# Altium PCB Banker_EDGE_2_BNC.PCBDOC
Units mm, origin at the board's own origin, x right, y up, seen from the top; angles counter-clockwise.
Board outline 45 x 72.8 mm, 2 copper layers (Top, Bot), stack 1.571 mm thick; 22 components, 25 nets, 96 pads, 64 vias.
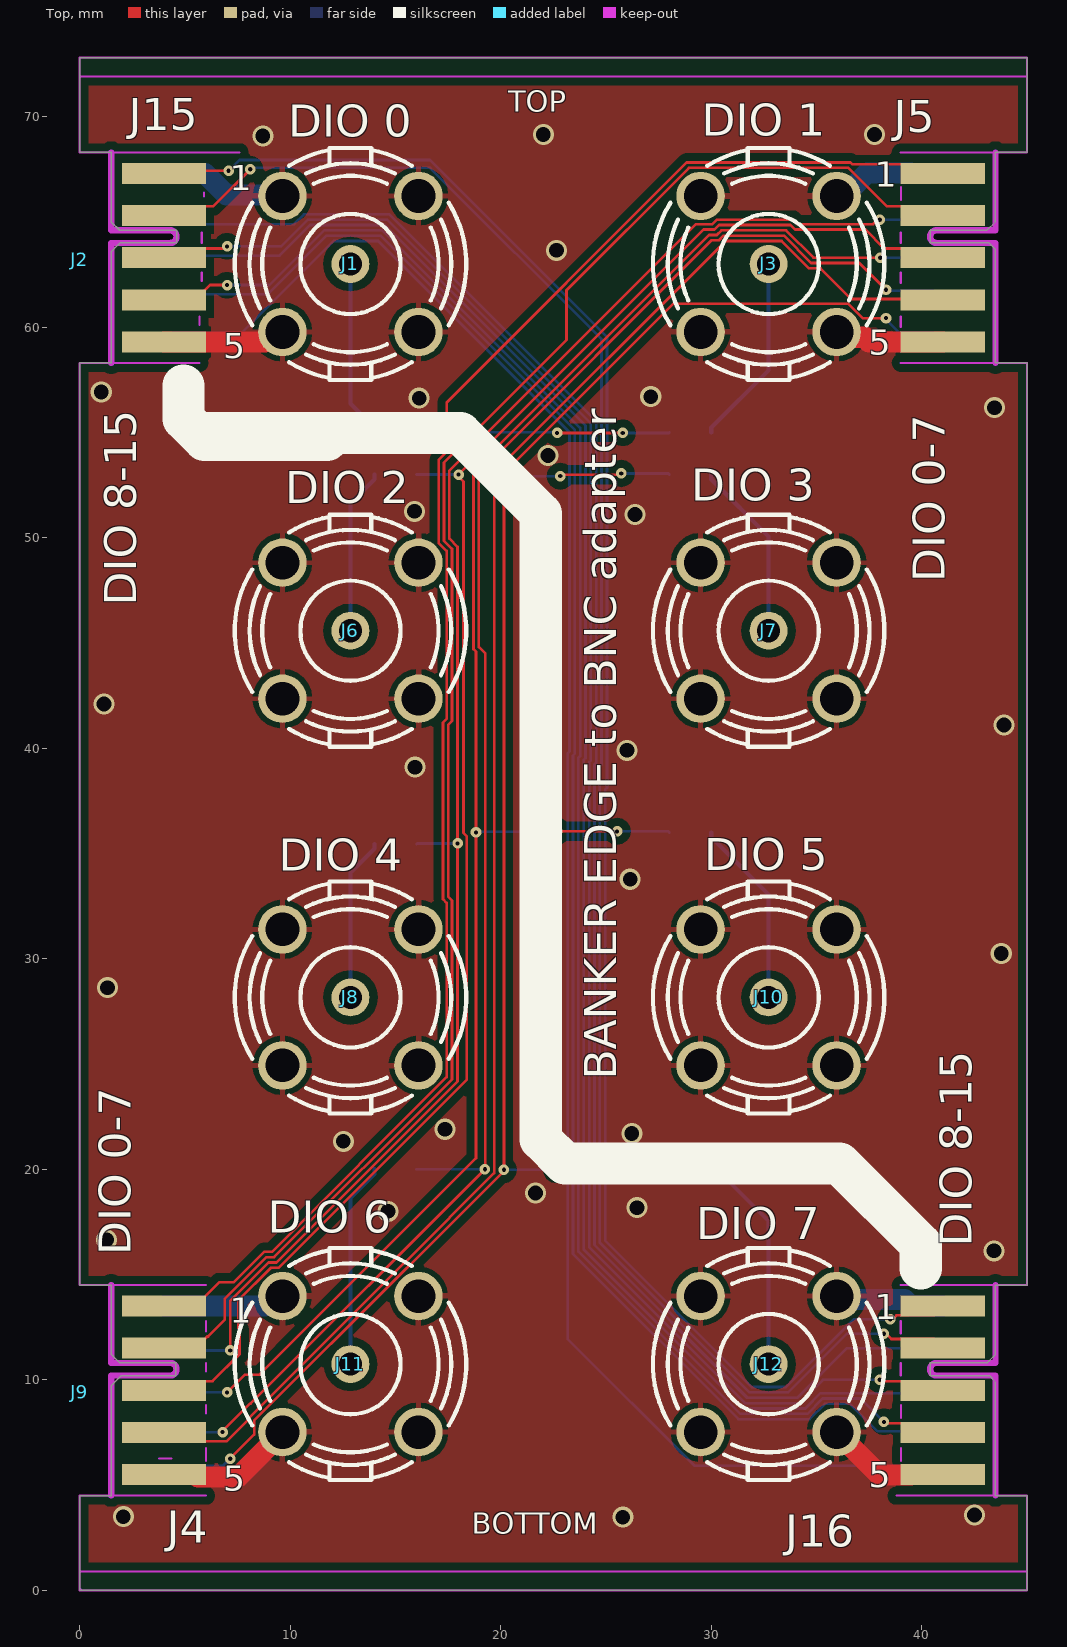
[diagram p0: Top view]
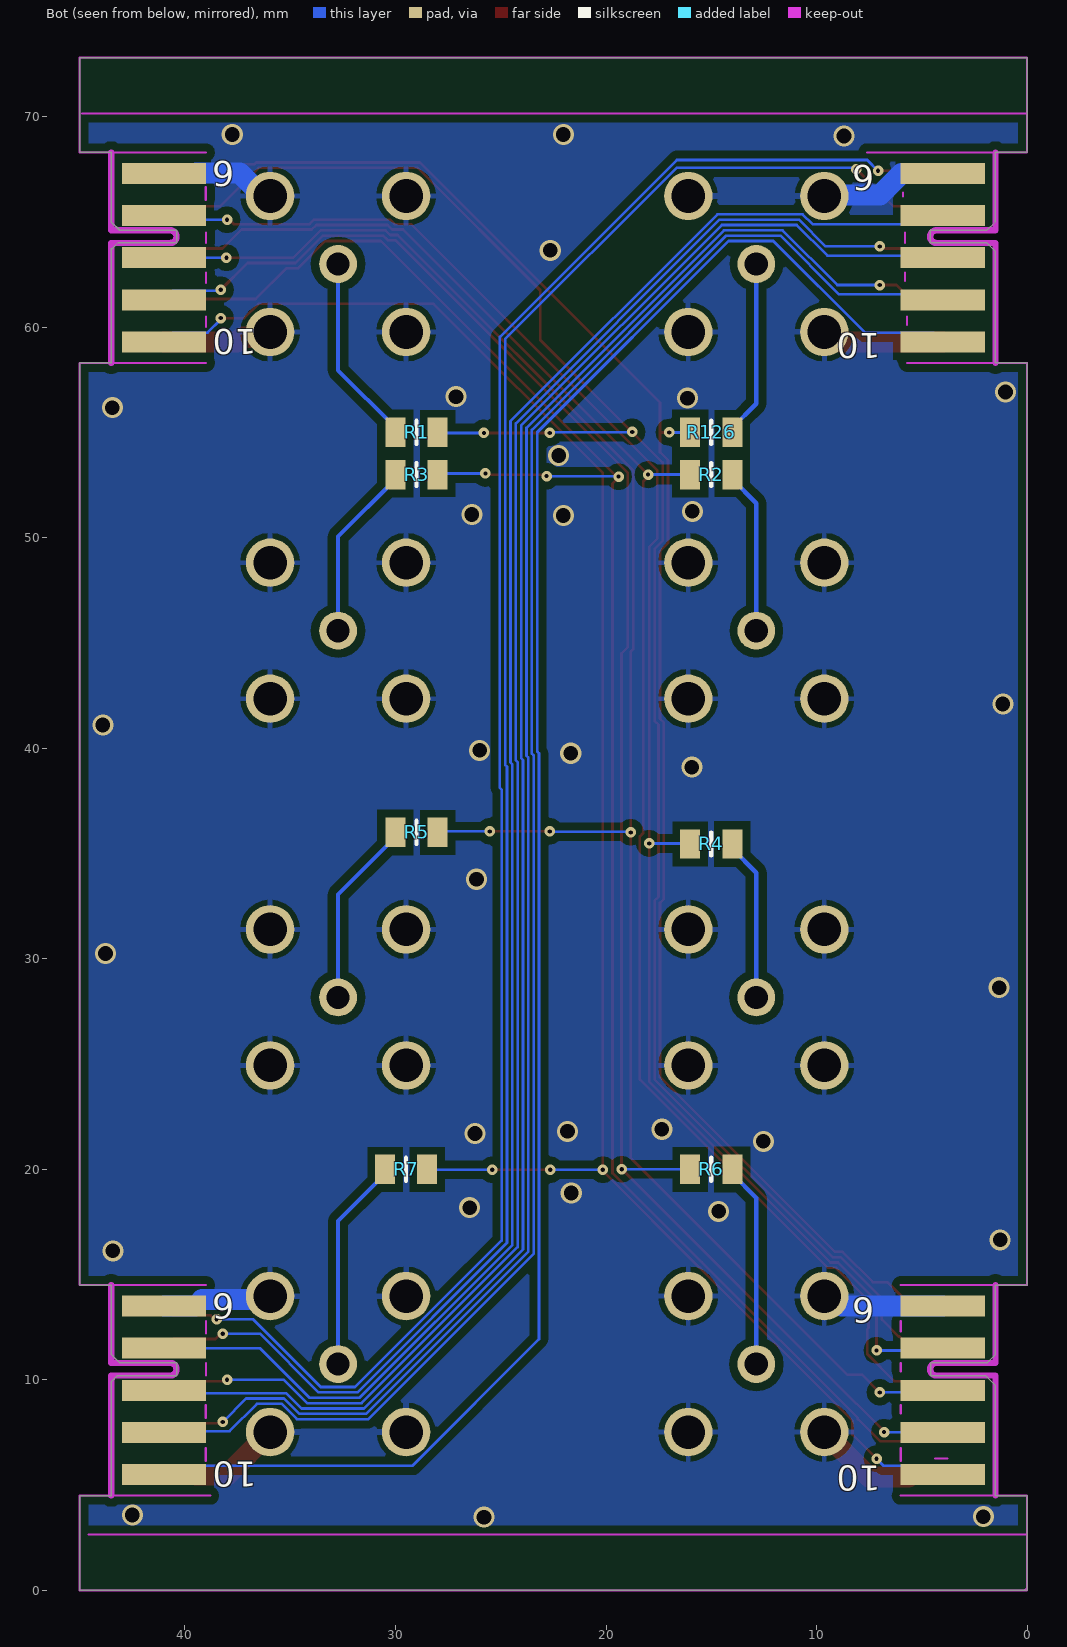
[diagram p1: Bot view, seen from below]
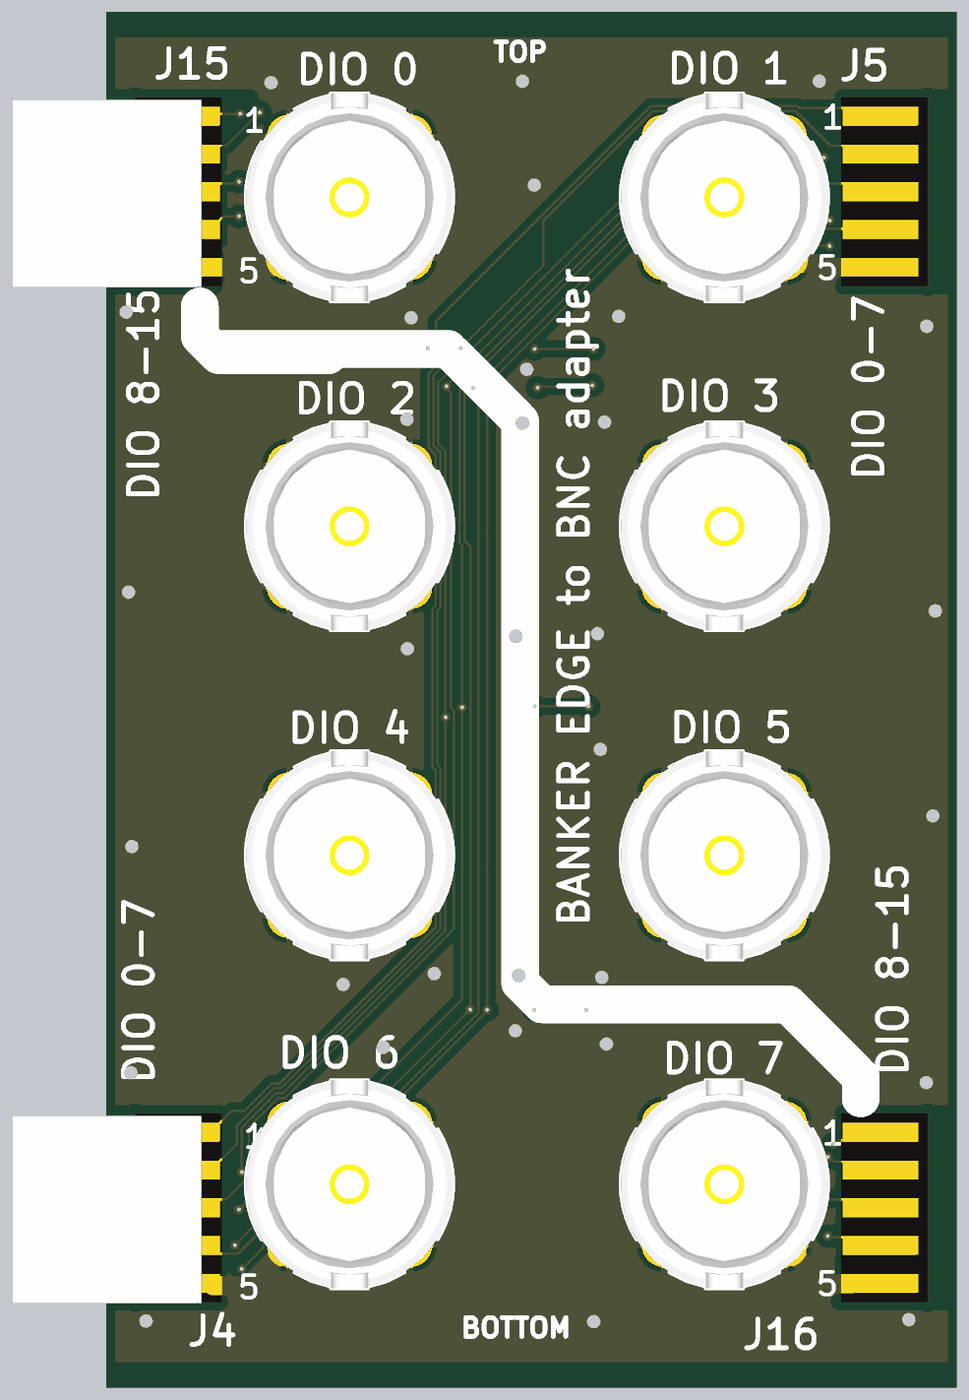
[diagram p2: 3D render of the assembled board from above, using the file's embedded part models]
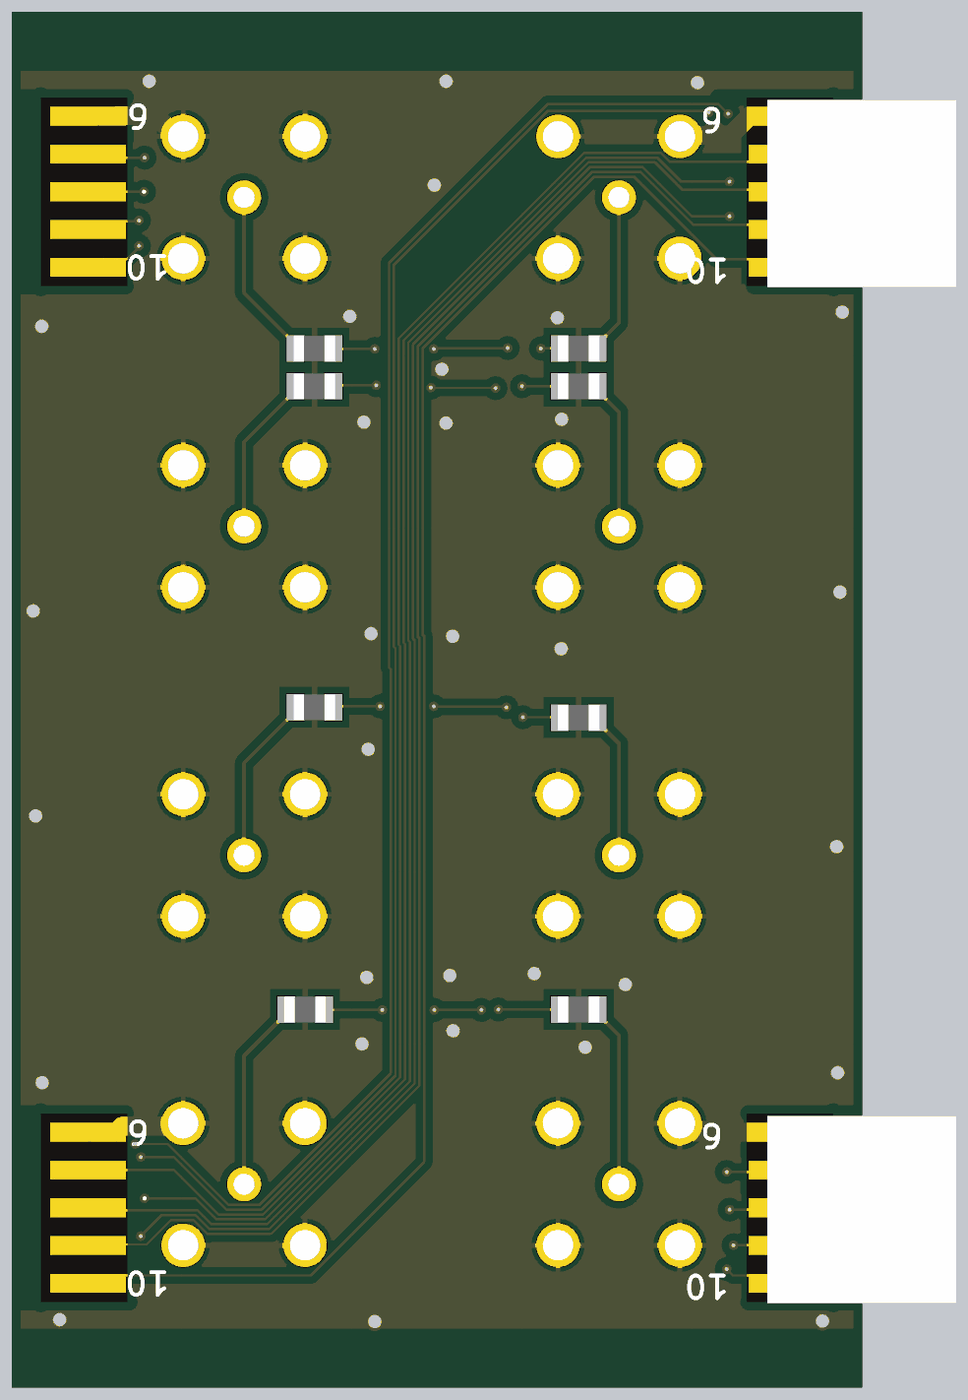
[diagram p3: 3D render of the assembled board from below, using the file's embedded part models]

## Layer stack, top to bottom
TopSolder: solder mask 0.0102, Solder Resist, Dk 3.5
Top: signal copper 0.0356
Dielectric1: core 1.5, FR-4, Dk 4.8
Bot: signal copper 0.0356
BottomSolder: solder mask 0.0102, Solder Resist, Dk 3.5

## Board outline
0,4.5 1.5,4.5 1.5,9.725 1.975,10.2 4.572,10.2 4.572,10.8 1.9,10.8 1.5,11.2 1.5,14.5 0,14.5 0,43.8 0,58.3 1.5,58.3 1.5,63.6 1.9,64 4.6,64 4.6,64.6 1.9,64.6 1.5,65 1.5,68.3 0,68.3 0,72.8 45,72.8 45,68.3 43.5,68.3 43.5,65 43.1,64.6 40.4,64.6 40.4,64 43.2,64 43.4,63.8 43.5,63.7 43.5,58.3 45,58.3 45,53.8 45,14.5 43.5,14.5 43.5,11.2 43.1,10.8 40.4,10.8 40.4,10.2 43.2,10.2 43.5,9.9 43.5,4.5 45,4.5 45,0 0,0

## Design rules (kind name [scope] priority, off if disabled: settings)
Clearance Clearance_DIFF [(InDifferentialPairClass('All Differential Pairs'))] p1: gap=0.127 ignorepadtopadclearanceinfootprint=FALSE except(0: Arc-Hole Track-Hole SMDPad-Hole THPad-Hole Via-Hole Fill-Hole Poly-Hole Region-Hole Text-Hole; 0.254: Arc-Poly Track-Poly SMDPad-Poly THPad-Poly Via-Poly Fill-Poly Poly-Poly Poly-Region Poly-Text)
Clearance [All] p2: gap=0.127 ignorepadtopadclearanceinfootprint=FALSE except(0: Arc-Hole Track-Hole SMDPad-Hole THPad-Hole Via-Hole Fill-Hole Poly-Hole Region-Hole Text-Hole; 0.381: Arc-Poly Track-Poly SMDPad-Poly THPad-Poly Via-Poly Fill-Poly Poly-Poly)
DiffPairsRouting [All] p1: maxlimit=0.254 minlimit=0.127 mostfreqgap=0.127 toplayer_minwidth=0.127 toplayer_maxwidth=0.381 toplayer_prefwidth=0.254 bottomlayer_minwidth=0.127 bottomlayer_maxwidth=0.381 bottomlayer_prefwidth=0.254 maxuncoupledlength=12.7
FabricationTestPointUsage TestPointUsage [All] p1: valid=0 allowmultiple=FALSE
FabricationTestpoint Testpoint [All] p1: side=3 testpointundercomponent=TRUE minsize=1.016 maxsize=2.54 preferedsize=1.524 minholesize=0.508 maxholesize=1.016 preferedholesize=0.813 testpointgrid=0.025 allowsidetop=TRUE allowsidebottom=TRUE usegrid=TRUE gridtolerance=0
HoleSize [All] p1: absolutevalues=TRUE maxlimit=3.81 minlimit=0.025 maxpercent=80.000 minpercent=20.000
HoleToHoleClearance [All] p1: gap=0.025 allowstackedmicrovias=TRUE
MinimumSolderMaskSliver [All] p1: minsoldermaskwidth=0
PlaneClearance [All] p1: clearance=0.254
PlaneConnect [All] p1: planeconnectstyle=Direct reliefexpansion=0.508 reliefentries=4 reliefconductorwidth=0.254 reliefairgap=0.254
PolygonConnect PolygonConnect_pad [(InPadClass('All Pads'))] p1: connectstyle=Relief reliefconductorwidth=0.254 reliefentries=4 polygonreliefangle="90 Angle" airgapwidth=0.254
PolygonConnect [All] p2: connectstyle=Direct reliefconductorwidth=0.254 reliefentries=4 polygonreliefangle="45 Angle" airgapwidth=0.254
RoomDefinition Banker_EDGE_2_BNC [InComponentClass('Banker_EDGE_2_BNC')] p1 off: confinementstyle=ConfineIn formatcopy=TRUE lockcomponents=FALSE outline 65.65,12.65 248.399,12.65 248.399,36.4 65.65,36.4
RoutingVias [All] p1: holewidth=0.2 width=0.5 viastyle="Through Hole" minholewidth=0.2 minwidth=0.5 maxholewidth=0.8 maxwidth=1.3
SilkToSilkClearance [All] p1: silktosilkclearance=0
SilkToSolderMaskClearance SilkscreenOverComponentPads [IsPad] p1: minsilkscreentomaskgap=0 clearancetoexposedcopper=TRUE
SolderMaskExpansion [All] p1: expansion=0.051
Width [All] p1: maxlimit=1.27 minlimit=0.127 preferedwidth=0.127
20 further rules are at their usual default settings.

## Components (designator, comment, footprint, x,y, rotation, side; value= is the part's Value field where it differs from the comment)
J1 "BNC" TYCO_5-1634503-1 12.861,63 r0 top
J2 "=Family" "AVX_00 9159 010 061 916" 0,63.2 r0 top
J3 "BNC" TYCO_5-1634503-1 32.725,63 r0 top
J4 "=Family" EDGE10T1B6_P200W1000L0F100X400 4,13.5 r270 top
J5 "=Family" EDGE10T5B10_P200W1000L0F100X400 41,59.3 r90 top
J6 "BNC" TYCO_5-1634503-1 12.861,45.582 r0 top
J7 "BNC" TYCO_5-1634503-1 32.725,45.582 r0 top
J8 "BNC" TYCO_5-1634503-1 12.861,28.163 r0 top
J9 "=Family" "AVX_00 9159 010 061 916" 0,9.4 r0 top
J10 "BNC" TYCO_5-1634503-1 32.725,28.163 r0 top
J11 "BNC" TYCO_5-1634503-1 12.861,10.745 r0 top
J12 "BNC" TYCO_5-1634503-1 32.725,10.745 r0 top
J15 "=Family" EDGE10T1B6_P200W1000L0F100X400 4,67.3 r270 top
J16 "=Family" EDGE10T5B10_P200W1000L0F100X400 41,5.5 r90 top
R1 "39" RESC2012X60N 29,55 r0 bottom
R2 "39" RESC2012X60N 15,53 r180 bottom
R3 "39" RESC2012X60N 29,53 r0 bottom
R4 "39" RESC2012X60N 15,35.45 r180 bottom
R5 "39" RESC2012X60N 29,36 r0 bottom
R6 "39" RESC2012X60N 15,20 r180 bottom
R7 "39" RESC2012X60N 29.495,20 r0 bottom
R126 "39" RESC2012X60N 15,55 r180 bottom

## Footprints (in the part's own frame and the unit in brackets; to place one, negate y for a bottom-side part, rotate by r counter-clockwise, add the part's x,y. Pads: shape width x height; smd on the part's side, far side on the other; paste and mask are expansions set on the pad)
"AVX_00 9159 010 061 916" [mm] "10 Contacts, 2mm Pitch, Open Ended Card Edge Connector, 9159 Series"
  body extent -5,-4.95 5,4.95, height 1.7
EDGE10T1B6_P200W1000L0F100X400 [mm] "10 contacts Board Edge Connector, First Left Top Pad 1, First Left Bottom Pad 2, Pitch 2mm, Length 0mm, Width 10mm, Finger Lenght 4mm, Finger Width 1mm"
  rect 1x4 smd paste-0.5: 1(0,0) 2(2,0) 3(4,0) 4(6,0) 5(8,0)
  rect 1x4 smd far side paste-0.5: 6(0,0) 7(2,0) 8(4,0) 9(6,0) 10(8,0)
  KeepOutLayer lines w0.3: 9,-2.5 3.3,-2.5 3.3,0.3 ccw(c3,0.3) 2.7,0.3 2.7,-2.5 -1,-2.5
EDGE10T5B10_P200W1000L0F100X400 [mm] "10 contacts Board Edge Connector, First Left Top Pad 5, First Left Bottom Pad 10, Pitch 2mm, Length 0mm, Width 10mm, Finger Lenght 4mm, Finger Width 1mm"
  rect 1x4 smd paste-0.5: 1(8,0) 2(6,0) 3(4,0) 4(2,0) 5(0,0)
  rect 1x4 smd far side paste-0.5: 6(8,0) 7(6,0) 8(4,0) 9(2,0) 10(0,0)
  KeepOutLayer lines w0.3: -1,-2.5 4.7,-2.5 4.7,0.3 cw(c5,0.3) 5.3,0.3 5.3,-2.5 9,-2.5
RESC2012X60N [mm] "Chip Resistor, EIA 0805, Metric 2012, Body 2.0x1.2mm, IPC Medium Density"
  rect 0.95x1.4 smd: 1(-1,0) 2(1,0)
  silkscreen extent 0,-0.55 0,0.55, body extent -1.1,-0.67 1.1,0.68, height 0.6
TYCO_5-1634503-1 [mm] "Low Profile Straight 50 Ohm BNC PCB Socket"
  round 1.8 hole 1.1: 1(0,0)
  round 2.3 hole 1.6: 2(-3.23,-3.23) 2(-3.23,3.23) 2(3.23,-3.23) 2(3.23,3.23)
  silkscreen extent -5.5,-5.51 5.5,5.51, body extent -5.5,-5.51 5.5,5.51, height 13.7

## Part data
J1 J3 J6 J7 J8 J10 J11 J12: library part Coax_1Female_1Shield, Manufacturer="TYCO ELECTRONICS", Manufacturer Part Number=5-1634503-1, Part Number=TYCO_5-1634503-1, ComponentHeight=13.7mm, Component Type=Standard, Family=BNC, Mounted=Yes, Part Description="Low Profile Straight 50 Ohm BNC PCB Socket", Pin Count=2, PressFit=No, Sense=No, SMD=No, Socket=No, Status=None
J2 J9: library part "AVX_00 9159 010 061 916", "Open Ended Card Edge Connector, 9159 Series", Manufacturer=AVX, Manufacturer Part Number="00 9159 010 061 916", Author="CERN DEM MR", ComponentHeight=1.6mm, Component Type=Standard, CreateDate=13/02/2018, HelpURL="\\cern.ch\dfs\Applications\Altium\Datasheets\AVX_00 9159 010 061 916.pdf", LatestRevisionDate=13/02/2018, Mounted=Yes, Part Description="10 Contacts, 2mm Pitch, Open Ended Card Edge Connector, 9159 Series", Part Number="AVX_00 9159 010 061 916", Pin Count=10, PressFit=No, Sense=No, SMD=No, Socket=No, Status=None
J4 J15: library part "PCB Edge Connector 10 (2x5)", "PCB Edge Connector 10 (2x5)", Part Number=EDGE10T1B6_P200W1000L0F100X400, Author="CERN DEM MR", ComponentHeight=0mm, Component Type="Standard (No BOM)", CreateDate=14.02.2018, HelpURL=\\cern.ch\dfs\Applications\Altium\Datasheets\EDGE10T1B6_P200W1000L0F100X400.pdf, Mounted=No, Part Description="10 Contacts Board Edge Connector, Pitch 2mm, Length 0mm, Width 10mm, Finger Lenght 4mm, Finger Width 1mm", Pin Count=10, PressFit=No, Sense=No, SMD=No, Socket=No, Status=None
J5 J16: library part "PCB Edge Connector 10 (2x5)", "PCB Edge Connector 10 (2x5)", Part Number=EDGE10T5B10_P200W1000L0F100X400, Author="CERN DEM MR", ComponentHeight=0mm, Component Type="Standard (No BOM)", CreateDate=14.02.2018, HelpURL=\\cern.ch\dfs\Applications\Altium\Datasheets\EDGE10T5B10_P200W1000L0F100X400.pdf, Mounted=No, Part Description="10 Contacts Board Edge Connector, Pitch 2mm, Length 0mm, Width 10mm, Finger Lenght 4mm, Finger Width 1mm", Pin Count=10, PressFit=No, Sense=No, SMD=No, Socket=No, Status=None
R1 R2 R3 R4 R5 R6 R7 R126: library part R0805_39R_1%_0.125W_100PPM, "Resistor - 1%", Case=0805, Manufacturer=GENERIC, Manufacturer1 ComponentHeight=0.6mm, Manufacturer1 Example="NIC COMPONENT", Manufacturer1 Part Number=NRC10F39R0TRF, Power=0.125W, Tolerance=±1%, Author="CERN DEM JLC", Component Type=Standard, CreateDate=03/12/2007, HelpURL=\\cern.ch\dfs\Applications\Altium\Datasheets\R0805_NIC_NRC.pdf, LatestRevisionDate=13/03/2008, Manufacturer Part Number=R0805_39R_1%_0.125W_100PPM, Mounted=Yes, Part Description="General Purpose Thick Film Chip Resistor", Part Number=R0805_39R_1%_0.125W_100PPM, Pin Count=2, PressFit=No, Sense=No, SMD=Yes, Socket=No, Status=Preferred, TC=±100ppm/°C

## Via types
v1: diameter 1, hole 0.7, Top to Bot, tented both sides, 32 vias
v2: diameter 0.5, hole 0.2, Top to Bot, tented both sides, 32 vias

## Nets (pads, with @x,y where several pads share a name; then routed paths per layer and width w, separated by ;. In a path a pad name is that pad's centre, name@x,y a point inside that pad or via, vN(x,y) a via of type N, cw(c..) or ccw(c..) an arc to the next point about the centre after c; other vN are vias at no path point)
EDGE0_DIO0: J4.1 J5.1 R126.1 | length 80.4
  Top w0.127: J4.1 5.5,13.5 6.641,14.641 7.324,14.641 8.76,16.078 9.131,16.078 17.432,24.378 17.432,32.657 17.256,32.833 17.256,41.222 17.432,41.398 17.432,49.367 17.052,49.747 17.052,53.679 17.432,54.059 17.432,55 ; v2(17,55) 17.432,55 ; J5.1 40.563,67.736 36.704,67.736 36.615,67.824 28.835,67.824 17.435,56.425 17.435,55.004 17.432,55
  Bot w0.127: R126.1 v2(17,55)
EDGE0_DIO1: J4.2 J5.2 R1.1 | length 90.2
  Top w0.127: J4.2 5.5,11.5 6.059,12.059 6.1,12.059 6.895,12.855 6.895,13.853 8.866,15.824 9.236,15.824 17.686,24.273 17.686,32.762 17.51,32.938 17.51,41.117 17.686,41.293 17.686,49.472 17.306,49.852 17.306,53.574 v2(18.757,55.025) 23.123,59.391 23.123,61.753 28.94,67.57 36.51,67.57 38.344,65.736 40.563,65.736 J5.2 ; v2(22.675,54.975) v2(25.8,54.975)
  Bot w0.127: v2@18.757,55.001 22.649,55.001 v2(22.675,54.975) ; v2(25.8,54.975) 27.975,54.975 R1.1
EDGE0_DIO2: J4.3 J5.3 R2.1 | length 81.5
  Top w0.127: J4.3 5.5,9.5 5.936,9.937 6.314,9.937 7.589,11.212 7.589,12.407 7.529,12.468 7.529,13.768 9.076,15.316 9.447,15.316 18.39,24.259 18.39,35.812 18.231,35.971 18.231,52.668 18,52.899 v2(18,53) 29.635,64.635 30.155,64.635 30.372,64.852 33.761,64.852 33.978,64.635 37.316,64.635 38.215,63.736 39.063,63.736 39.5,63.3 J5.3
  Bot w0.127: R2.1 v2(18,53)
EDGE0_DIO3: J4.4 J5.4 R3.1 | length 90.5
  Top w0.127: J4.4 4.425,7.074 6.972,7.074 8.037,8.139 8.037,8.175 15.431,15.57 15.442,15.57 19.69,19.818 19.69,52.568 v2@19.358,52.9 ; v2@19.332,52.9 v2@19.358,52.9 ; v2(22.825,52.925) 22.887,52.987 25.662,52.987 v2(25.725,53.05) ; J5.4 40.964,61.335 36.644,61.335 35.188,62.792 34.642,62.792 33.343,64.09 30.688,64.09 19.498,52.9 v2(19.4,52.9) v2@19.358,52.9
  Bot w0.127: v2(19.4,52.9) 19.412,52.913 22.812,52.913 v2(22.825,52.925) ; v2(25.725,53.05) 27.95,53.05 R3.1
EDGE0_DIO4: J4.7 J5.7 R4.1 | length 80.4
  Top w0.127: v2(7.149,11.395) 7.149,13.747 8.971,15.57 9.342,15.57 17.95,24.178 17.95,35.465 17.94,35.475 17.95,35.485 17.95,49.567 17.56,49.958 17.56,53.182 29.267,64.889 30.05,64.889 30.267,65.106 33.866,65.106 34.083,64.889 37.682,64.889 37.899,65.106 v2(38,65.106)
  Bot w0.127: J4.7 4.105,11.395 v2(7.149,11.395) ; R4.1 16.025,35.475 v2(17.95,35.475) ; v2(38,65.106) 40.807,65.106 J5.7
EDGE0_DIO5: J4.8 J5.8 R5.1 | length 89
  Top w0.127: v2(7,9.4) 7.843,10.244 8.544,10.244 18.825,20.525 v2(18.825,36) ; v2@18.825,36.001 18.825,44.585 18.705,44.704 18.705,53.188 29.899,64.381 30.261,64.381 30.478,64.598 33.553,64.598 34.852,63.3 v2(38.029,63.3) ; v2(22.675,36.05) v2(25.525,36.05)
  Bot w0.127: J4.8 4.1,9.4 v2(7,9.4) ; v2(18.825,36) 18.85,36.025 22.65,36.025 v2(22.675,36.05) ; v2(25.525,36.05) 27.95,36.05 R5.1 ; v2(38.029,63.3) J5.8
EDGE0_DIO6: J4.9 J5.9 R6.1 | length 84.3
  Top w0.127: v2(6.79,7.515) 6.79,7.557 8.097,8.864 8.114,8.864 v2(19.25,20) 19.265,20 19.265,44.503 18.959,44.809 18.959,53.082 30.005,64.127 30.366,64.127 30.583,64.344 33.448,64.344 34.747,63.046 37.03,63.046 v2(38.3,61.776)
  Bot w0.127: J4.9@4.59,7.515 v2(6.79,7.515) ; R6.1 v2(19.25,20) ; v2(38.3,61.776) 38.34,61.736 40.563,61.736 J5.9
EDGE0_DIO7: J4.10 J5.10 R7.1 | length 89
  Top w0.127: v2(7.149,6.254) 8.291,7.396 8.291,8.07 15.536,15.316 15.548,15.316 20.058,19.826 20.058,19.918 20,19.976 20.151,20.127 20.151,53.074 28.188,61.11 36.51,61.11 37.19,60.43 v2(38.3,60.43) ; v2(22.65,19.975) v2(25.4,19.975)
  Bot w0.127: J4.10 4.416,5.916 6.811,5.916 v2(7.149,6.254) ; v2@20.151,19.975 v2@22.65,19.975 ; v2(25.4,19.975) 28.47,19.975 R7.1 ; v2(38.3,60.43) 38.3,60.36 38.923,59.736 40.563,59.736 J5.10
  other v2: 20.151,19.976
EDGE1_DIO0: J15.1 J16.1 | length 88.3
  Top w0.127: J15.1 4.125,67.425 v2(7.075,67.425) ; v2(38.5,12.875) 38.601,12.875 38.789,13.063 40.563,13.063 J16.1
  Bot w0.127: v2(7.075,67.425) 7.59,67.94 16.636,67.94 25.043,59.533 25.043,38.116 24.96,38.032 24.96,16.615 31.92,9.654 33.549,9.654 36.77,12.875 v2(38.5,12.875)
EDGE1_DIO1: J15.2 J16.2 | length 88.7
  Top w0.127: J15.2 4.436,65.736 6.341,65.736 v2(8.104,67.5) ; v2(38.2,12.19) 38.301,12.19 38.554,11.936 40.563,11.936 J16.2
  Bot w0.127: v2(8.104,67.5) 8.175,67.57 16.647,67.57 24.789,59.428 24.789,39.212 24.706,39.128 24.706,16.51 31.815,9.4 33.654,9.4 36.443,12.19 v2(38.2,12.19)
EDGE1_DIO2: J15.3 J16.3 | length 84.7
  Top w0.127: J15.3 5.5,63.3 5.936,63.736 6.799,63.736 6.899,63.836 v2(7,63.836) ; v2(38,10) 38.064,9.936 39.063,9.936 39.5,9.5 J16.3
  Bot w0.127: v2(7,63.836) 9.57,63.836 10.84,65.106 14.603,65.106 24.281,55.428 24.281,39.423 24.198,39.339 24.198,16.299 31.604,8.892 34.198,8.892 35.305,10 v2(38,10)
EDGE1_DIO3: J15.4 J16.4 | length 85.7
  Top w0.127: J15.4 5.5,61.3 6.2,62 v2(7,62) ; v2(38.2,8) 38.264,7.936 40.563,7.936 J16.4
  Bot w0.127: v2(7,62) 9.013,62 11.611,64.598 14.393,64.598 23.773,55.218 23.773,39.633 23.69,39.549 23.69,16.089 31.394,8.384 34.57,8.384 35.295,9.109 37.091,9.109 v2(38.2,8)
EDGE1_DIO4: J15.7 J16.7 | length 84.7
  Bot w0.127: J15.7 5.526,65.3 5.936,64.889 10.187,64.889 10.658,65.36 14.709,65.36 24.535,55.534 24.535,39.318 24.452,39.234 24.452,16.404 31.709,9.146 34.093,9.146 36.446,11.5 J16.7
EDGE1_DIO5: J15.8 J16.8 | length 84.3
  Bot w0.127: J15.8 4.096,63.396 9.489,63.396 10.946,64.852 14.498,64.852 24.027,55.323 24.027,39.528 23.944,39.444 23.944,16.194 31.499,8.638 34.464,8.638 35.189,9.363 40.864,9.363 J16.8
EDGE1_DIO6: J15.9 J16.9 | length 85.4
  Bot w0.127: J15.9 4.26,61.56 8.932,61.56 11.717,64.344 14.288,64.344 23.519,55.113 23.519,39.738 23.436,39.654 23.436,15.983 31.288,8.13 34.675,8.13 35.4,8.855 36.584,8.855 37.88,7.559 40.94,7.559 J16.9
EDGE1_DIO7: J15.10 J16.10 | length 88.6
  Bot w0.127: J15.10 4.436,59.736 7.702,59.736 12.056,64.09 14.182,64.09 23.265,55.007 23.265,39.844 23.182,39.76 23.182,11.933 29.198,5.916 40.584,5.916 J16.10
GND: J1.2 J3.2 J4.5 J4.6 J5.5 J5.6 J6.2 J7.2 J8.2 J10.2 J11.2 J12.2 J15.5 J15.6 J16.5 J16.6 | length 46.2
  Top w1: J4.5 5.5,5.5 5.623,5.377 7.512,5.377 9.631,7.496 J11.2@9.631,7.515 ; J15.5 8.81,59.3 9.28,59.77 J1.2@9.631,59.77 ; J12.2@35.955,7.515 37.99,5.48 39.48,5.48 39.5,5.5 J16.5 ; J3.2@35.955,59.77 36.204,59.521 37.279,59.521 37.5,59.3 J5.5
  Bot w1: J4.6 8.805,13.5 9.28,13.975 J11.2@9.631,13.975 ; J15.6 5.96,67.3 6.981,66.278 9.583,66.278 J1.2@9.631,66.23 ; J12.2@35.955,13.975 36.107,13.823 39.177,13.823 39.5,13.5 J16.6 ; J3.2@35.955,66.23 36.307,66.23 37.397,67.32 39.48,67.32 39.5,67.3 J5.6
  other v1: 25.8,3.475 2.075,3.5 42.5,3.575 43.425,16.125 1.275,16.65 14.65,18 26.475,18.175 21.65,18.875 12.525,21.325 26.225,21.7 21.825,21.8 17.35,21.9 1.325,28.625 43.775,30.25 26.15,33.775 15.925,39.1 21.675,39.76 26,39.9 43.9,41.1 1.15,42.1 22.025,51.05 26.375,51.1 15.9,51.25 22.25,53.9 43.45,56.175 16.125,56.625 27.125,56.7 1.025,56.925 22.649,63.65 8.7,69.075 22.025,69.15 37.754,69.15
NetJ1_1: J1.1 R126.2 | length 8.5
  Bot w0.2: J1.1 12.861,56.364 14,55.225 R126.2
NetJ3_1: J3.1 R1.2 | length 9.1
  Bot w0.2: R1.2 30,55.225 32.725,57.95 J3.1
NetJ6_1: J6.1 R2.2 | length 7.9
  Bot w0.2: J6.1 12.861,51.636 14,52.775 R2.2
NetJ7_1: J7.1 R3.2 | length 8.5
  Bot w0.2: R3.2 30,52.775 32.725,50.05 J7.1
NetJ8_1: J8.1 R4.2 | length 7.8
  Bot w0.2: J8.1 12.861,34.086 14,35.225 R4.2
NetJ10_1: J10.1 R5.2 | length 9
  Bot w0.2: R5.2 30,35.775 32.725,33.05 J10.1
NetJ11_1: J11.1 R6.2 | length 9.7
  Bot w0.2: J11.1 12.861,18.636 14,19.775 R6.2
NetJ12_1: J12.1 R7.2 | length 10.2
  Bot w0.2: R7.2 30.495,19.775 32.725,17.545 J12.1

## Polygon pours and split planes (outlines as drawn)
GND on Bot "Bot-GND" (solid, remove dead copper, pour order 2): 0,72.8 45,72.8 45,0 44.9,0.1 0,0.1
GND on Top "Top-GND" (solid, remove dead copper, pour order 0): 0.2,72.6 44.8,72.6 44.8,68.5 43.305,68.5 43.3,68.495 43.3,58.1 44.8,58.1 44.8,0.2 0.2,0.2

## Keep-outs
Top:
  lines w0.1: 0,0.9 33.7,0.9 ; 0,71.9 33.7,71.9 ; 11.227,0.9 44.927,0.9 ; 11.227,71.9 44.927,71.9
Bot:
  lines w0.1: 0,2.65 33.35,2.65 ; 0,70.15 33.65,70.15 ; 11.227,2.65 44.577,2.65 ; 11.227,70.15 44.877,70.15
KeepOutLayer:
  lines w0.1: 1.5,4.5 0,4.5 ; 3.77,6.254 4.37,6.254 ; 5.7,58.3 0,58.3 0,53.8 0,14.5 ; 5.7,60.1 5.7,60.5 ; 5.8,62.2 5.8,62.6 ; 5.8,64 5.8,64.5 ; 5.9,66.2 5.9,66.4 ; 6,4.5 0,4.5 ; 6,6.157 6,6.757 ; 6,8.4 6,8.8 ; 6,10.4 6,10.8 ; 6,12.3 6,12.8 ; 7.6,68.3 0,68.3 ; 38.8,4.5 45,4.5 ; 39,10.2 39,10.8 ; 39,12.2 39,12.8 ; 39,14.5 45,14.5 45,43.8 ; 39,58.3 45,58.3 45,53.8 ; 39,60 39,60.5 ; 39,62.1 39,62.6 ; 39,64 39,64.5 ; 39.01,6.157 39.01,6.757 ; 39.01,8.191 39.01,8.791 ; 39.01,66.043 39.01,66.643 ; 0,0 0,4.5 ; 0,0 0,0 ; 0,0 45,0 ; 0,4.5 0,0.1 0.1,0 45,0 ; 0,14.5 0,14.5 ; 0,14.5 6,14.5 ; 0,68.3 0,72.8 ; 0,68.3 0,68.3 ; 0,72.8 45,72.8 ; 0,72.8 0,72.8 ; 6,14.5 6,14.5 ; 39,68.3 45,68.3 45,72.8 ; 39,68.3 39,68.3 ; 45,0 45,4.5 ; 45,0 45,4.5 ; 45,43.8 45,53.8 ; 45,43.8 45,43.8 ; 45,53.8 45,53.8 ; 45,72.8 45,72.8

## Silkscreen, mask and mechanical layers (free items; w line width, h text height)
TopOverlay:
  lines w2: 4.925,57.225 4.925,55.65 5.925,54.65 11.75,54.65 ; 6.025,54.975 18.075,54.975 21.9,51.15 21.9,21.425 23.05,20.275 36.1,20.275 39.95,16.425 39.95,15.3
  text "TOP" at 20.35,70.225 h1
  text "DIO 1" at 29.55,69.1 h1.52
  text "DIO 0" at 9.9,69.05 h1.52
  text "DIO 3" at 29.05,51.75 h1.52
  text "DIO 2" at 9.775,51.625 h1.52
  text "DIO 0-7" at 41.1,47.875 h1.52 r90
  text "DIO 8-15" at 2.675,46.775 h1.52 r90
  text "DIO 5" at 29.675,34.2 h1.52
  text "DIO 4" at 9.45,34.175 h1.52
  text "BANKER EDGE to BNC adapter" at 25.475,24.25 h1.52 r90
  text "DIO 6" at 8.925,16.975 h1.52
  text "DIO 7" at 29.275,16.675 h1.52
  text "DIO 8-15" at 42.375,16.325 h1.52 r90
  text "DIO 0-7" at 2.425,15.925 h1.52 r90
  text "BOTTOM" at 18.631,2.675 h1
Mechanical1:
  lines w0.2: 0,43.8 0,14.5 ; 0,14.5 0,14.5
  lines w0.254: 0,14.5 1.5,14.5 1.5,11.2 1.9,10.8 4.572,10.8 4.572,10.2 1.975,10.2 1.5,9.725 1.5,4.5 0,4.5 0,0 45,0 45,4.5 43.5,4.5 43.5,9.9 43.2,10.2 40.4,10.2 40.4,10.8 43.1,10.8 43.5,11.2 43.5,14.5 45,14.5 45,53.8 45,58.3 43.5,58.3 43.5,63.7 43.4,63.8 43.2,64 40.4,64 40.4,64.6 43.1,64.6 43.5,65 43.5,68.3 45,68.3 45,72.8 0,72.8 0,68.3 1.5,68.3 1.5,65 1.9,64.6 4.6,64.6 4.6,64 1.9,64 1.5,63.6 1.5,58.3 0,58.3 0,43.8

## Text inside footprints (layer, text, board x,y; h text height)
J4: TopOverlay "1" at 7.125,12.7 h1.2; TopOverlay "5" at 6.825,4.72 h1.2; BottomOverlay "6" at 7.25,13.9 h1.2 r180; BottomOverlay "10" at 6.95,5.92 h1.2 r180
J5: TopOverlay "5" at 37.475,58.7 h1.2; TopOverlay "1" at 37.775,66.68 h1.2; BottomOverlay "10" at 36.6,59.9 h1.2 r180; BottomOverlay "6" at 37.65,67.88 h1.2 r180
J15: TopOverlay "1" at 7.125,66.5 h1.2; TopOverlay "5" at 6.825,58.52 h1.2; BottomOverlay "6" at 7.25,67.7 h1.2 r180; BottomOverlay "10" at 6.95,59.72 h1.2 r180
J16: TopOverlay "5" at 37.475,4.9 h1.2; TopOverlay "1" at 37.775,12.88 h1.2; BottomOverlay "10" at 36.6,6.1 h1.2 r180; BottomOverlay "6" at 37.65,14.08 h1.2 r180